# Altium PCB PCB-15_19_prototyp.PcbDoc (part 4 of 4)
Units mm, origin at the board's own origin, x right, y up, seen from the top; angles counter-clockwise.
Board outline 190 x 150 mm, 8 copper layers (Top Layer, VCC3V3, Internal Plane 1, Internal Plane 2, Mid-Layer 1, GND, Mid-Layer 2, Bottom Layer), stack 1.301 mm thick; 129 components, 396 nets, 1206 pads, 700 vias.
Unrouted connection lines stored in the file: 9.
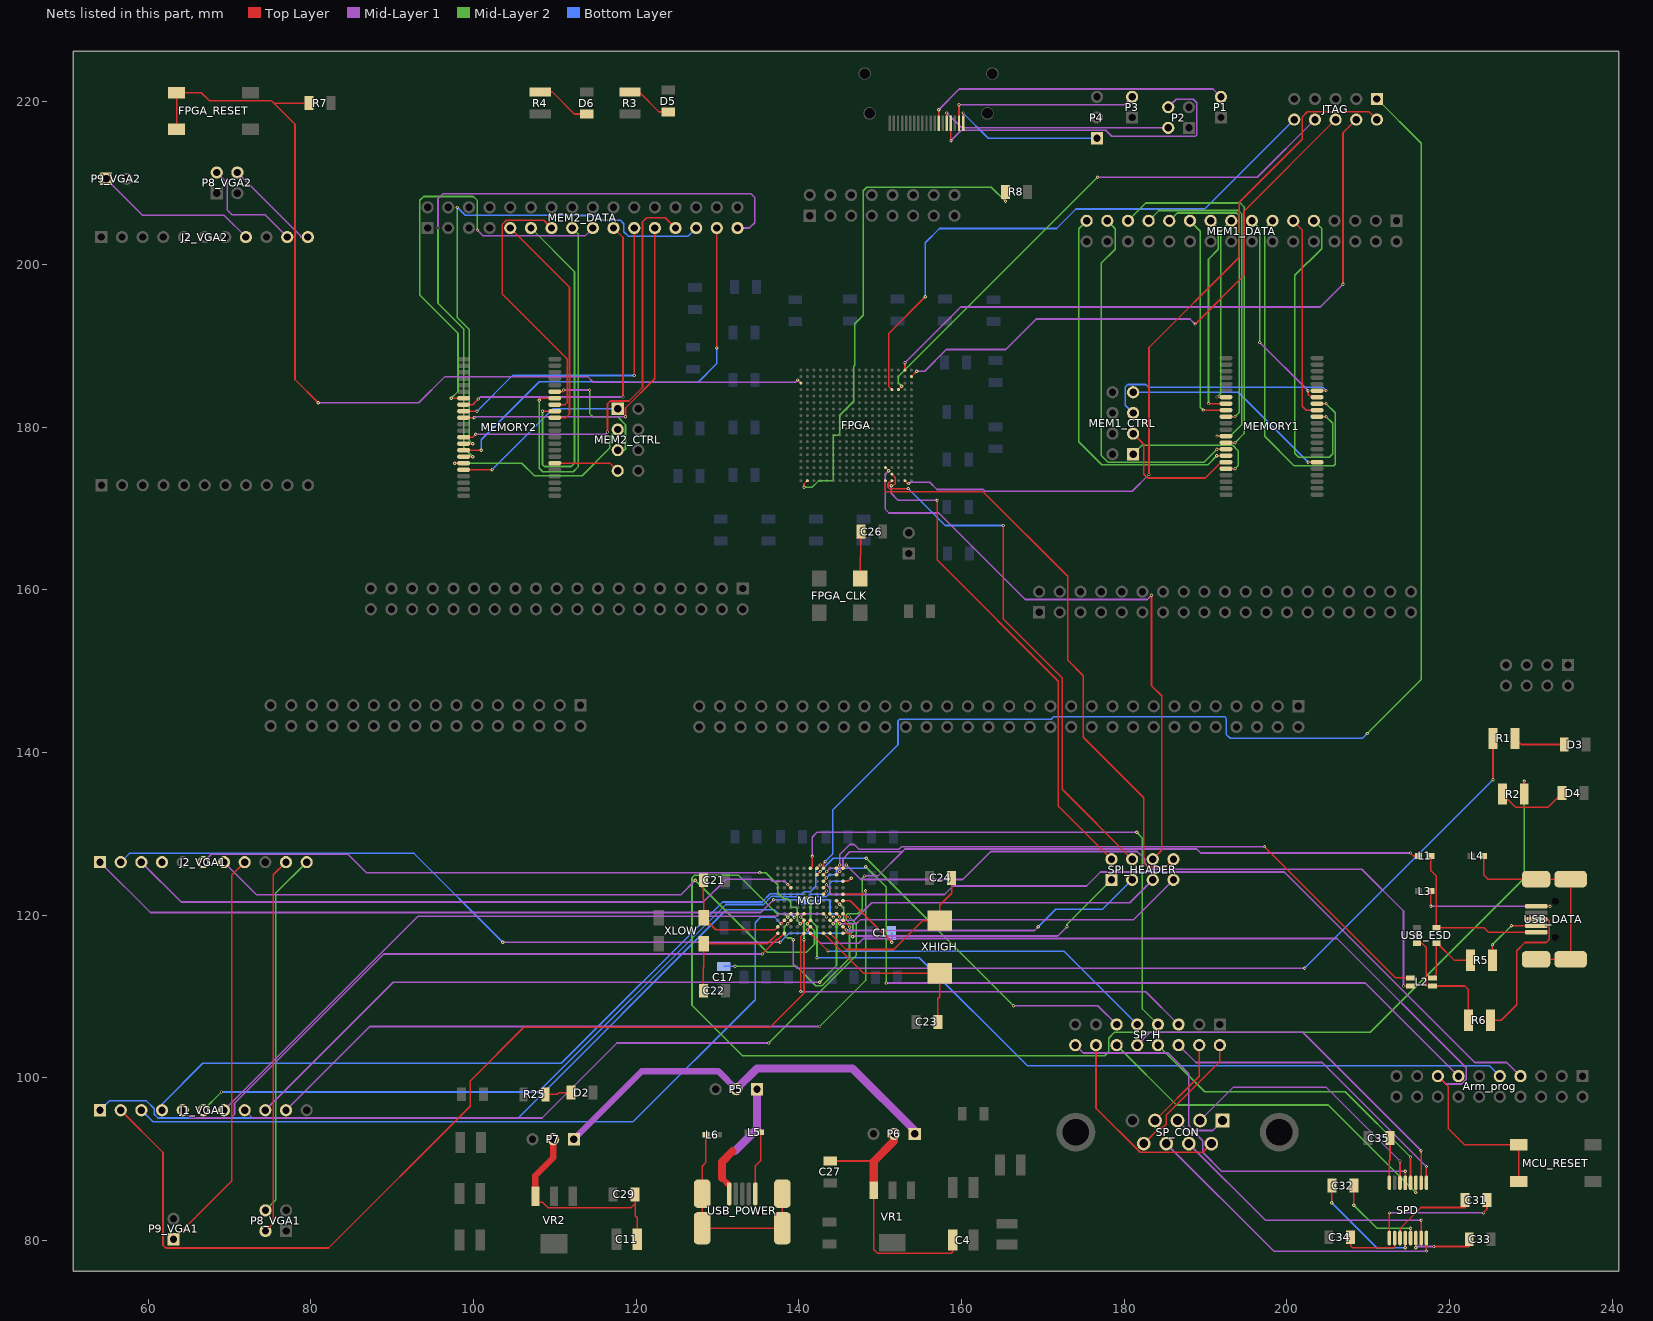
[diagram p10: the nets of this part, all layers, seen from the top]

## Via types
v1: diameter 0.4, hole 0.2, Top Layer to Bottom Layer, 696 vias
v2: diameter 7, hole 5, Top Layer to Bottom Layer, 4 vias

## Nets (pads, with @x,y where several pads share a name; then routed paths per layer and width w, separated by ;. In a path a pad name is that pad's centre, name@x,y a point inside that pad or via, vN(x,y) a via of type N, cw(c..) or ccw(c..) an arc to the next point about the centre after c; other vN are vias at no path point) (continued)
I_MEMORY.BUS4_Data_mem1: MEM1_DATA.9 MEMORY1.13 | length 41.4
  Top Layer w0.2: MEMORY1.13@203.72,181.286 v1(204.826,181.286)
  Mid-Layer 2 w0.2: MEM1_DATA.9@203.327,205.359 204.277,204.409 204.277,201.94 200.99,198.653 200.99,176.784 201.473,176.301 205.232,176.301 205.638,176.708 205.638,180.473 v1(204.826,181.286)
I_MEMORY.BUS4_Data_mem2: MEM2_DATA.9 MEMORY2.13 | length 27.9
  Top Layer w0.2: MEM2_DATA.9@104.521,204.47 111.811,197.18 111.811,181.616 111.354,181.159 MEMORY2.13@109.994,181.159
I_MEMORY.BUS5_Data_mem1: MEM1_DATA.11 MEMORY1.14 | length 25.3
  Top Layer w0.2: MEM1_DATA.11@200.787,205.359 201.905,204.241 201.905,182.569 202.387,182.086 MEMORY1.14@203.72,182.086
I_MEMORY.BUS5_Data_mem2: MEM2_DATA.11 MEMORY2.14 | length 43.4
  Top Layer w0.2: v1(108.483,181.959) MEMORY2.14@109.994,181.959
  Mid-Layer 2 w0.2: MEM2_DATA.11@107.061,204.47 112.42,199.111 112.42,175.565 112.014,175.158 108.687,175.158 108.483,175.362 v1(108.483,181.959)
I_MEMORY.BUS6_Data_mem1: MEM1_DATA.13 MEMORY1.15 | length 46.1
  Top Layer w0.2: MEMORY1.15@203.72,182.886 v1(204.826,182.886)
  Mid-Layer 2 w0.2: MEM1_DATA.13@198.247,205.359 197.282,204.394 197.282,178.867 200.889,175.26 205.765,175.26 205.943,175.438 205.943,181.768 v1(204.826,182.886)
I_MEMORY.BUS6_Data_mem2: MEM2_DATA.13 MEMORY2.15 | length 33.5
  Top Layer w0.2: MEM2_DATA.13@109.601,204.47 108.651,205.42 104.038,205.42 103.556,204.937 103.556,196.342 111.506,188.392 111.506,183.013 111.252,182.759 MEMORY2.15@109.994,182.759
I_MEMORY.BUS7_Data_mem1: MEM1_DATA.15 MEMORY1.16 | length 25.4
  Top Layer w0.2: v1(202.616,184.455) 202.616,183.896 MEMORY1.16@203.72,183.686
  Mid-Layer 1 w0.2: v1(196.672,190.398) v1(202.616,184.455)
  Mid-Layer 2 w0.2: MEM1_DATA.15@195.707,205.359 196.672,204.394 v1(196.672,190.398)
I_MEMORY.BUS7_Data_mem2: MEM2_DATA.15 MEMORY2.16 | length 45.3
  Top Layer w0.2: v1(108.077,183.286) 108.35,183.559 MEMORY2.16@109.994,183.559
  Mid-Layer 2 w0.2: v1(108.077,183.286) 108.077,174.955 108.509,174.523 112.268,174.523 112.903,175.158 112.903,203.708 MEM2_DATA.15@112.141,204.47
I_MEMORY.BUS8_Data_mem1: MEM1_DATA.17 MEMORY1.29 | length 23.5
  Top Layer w0.2: v1(191.414,183.693) 191.421,183.686 MEMORY1.29@192.52,183.686
  Mid-Layer 2 w0.2: v1(191.414,183.693) 191.877,184.155 191.877,204.069 MEM1_DATA.17@193.167,205.359
I_MEMORY.BUS8_Data_mem2: MEM2_DATA.17 MEMORY2.29 | length 54.1
  Top Layer w0.2: v1(97.282,183.559) MEMORY2.29@98.794,183.559
  Mid-Layer 1 w0.2: v1(100.482,204.216) 101.194,203.505 113.716,203.505 MEM2_DATA.17@114.681,204.47
  Mid-Layer 2 w0.2: v1(97.282,183.559) 98.095,184.372 98.095,191.541 93.396,196.24 93.396,207.874 93.878,208.356 99.974,208.356 100.482,207.848 v1(100.482,204.216)
I_MEMORY.BUS9_Data_mem1: MEM1_DATA.19 MEMORY1.30 | length 25.5
  Top Layer w0.2: v1(190.373,182.886) MEMORY1.30@192.52,182.886
  Mid-Layer 2 w0.2: v1(190.373,182.886) 190.373,200.65 191.577,201.854 191.577,204.409 MEM1_DATA.19@190.627,205.359
I_MEMORY.BUS9_Data_mem2: MEM2_DATA.19 MEMORY2.30 | length 41.2
  Top Layer w0.2: MEMORY2.30@98.794,182.759 99.892,182.759 v1(100.586,183.453) ; MEM2_DATA.19@117.221,204.47 118.389,203.302 v1(118.389,183.693)
  Mid-Layer 1 w0.2: v1(100.586,183.453) 100.826,183.693 v1(118.389,183.693)
I_MEMORY.BUS10_Data_mem1: MEM1_DATA.21 MEMORY1.31 | length 26.8
  Top Layer w0.2: v1(189.713,182.086) MEMORY1.31@192.52,182.086
  Mid-Layer 2 w0.2: MEM1_DATA.21@188.087,205.359 189.357,204.089 189.357,182.442 v1(189.713,182.086)
I_MEMORY.BUS10_Data_mem2: MEM2_DATA.21 MEMORY2.31 | length 40.9
  Top Layer w0.2: MEMORY2.31@98.794,181.959 v1(100.432,181.959) ; v1(119.761,186.334) MEM2_DATA.21@119.761,204.47
  Bottom Layer w0.2: v1(100.432,181.959) 104.807,186.334 v1(119.761,186.334)
I_MEMORY.BUS11_Data_mem1: MEM1_DATA.23 MEMORY1.32 | length 35.2
  Top Layer w0.2: MEMORY1.32@192.52,181.286 v1(193.624,181.286)
  Mid-Layer 2 w0.2: MEM1_DATA.23@185.547,205.359 186.512,206.324 193.853,206.324 194.132,206.045 194.132,181.794 v1(193.624,181.286)
I_MEMORY.BUS11_Data_mem2: MEM2_DATA.23 MEMORY2.32 | length 44.6
  Top Layer w0.2: MEMORY2.32@98.794,181.159 v1(100.076,181.159) ; v1(118.694,181.28) 118.694,182.347 122.301,185.953 MEM2_DATA.23@122.301,204.47
  Mid-Layer 1 w0.2: v1(100.076,181.159) 100.197,181.28 v1(118.694,181.28)
I_MEMORY.BUS12_Data_mem1: MEM1_DATA.25 MEMORY1.35 | length 42.8
  Top Layer w0.2: v1(191.414,178.892) 191.421,178.886 MEMORY1.35@192.52,178.886
  Mid-Layer 2 w0.2: MEM1_DATA.25@183.007,205.359 184.277,206.629 194.056,206.629 194.437,206.248 194.437,180.289 193.04,178.892 v1(191.414,178.892)
I_MEMORY.BUS12_Data_mem2: MEM2_DATA.25 MEMORY2.35 | length 51.7
  Top Layer w0.2: MEMORY2.35@98.794,178.759 99.898,178.759 v1(100.26,179.121) ; v1(116.484,179.4) 116.484,182.88 116.815,183.21 119.126,183.21 120.777,184.861 120.777,205.232 121.285,205.74 123.571,205.74 MEM2_DATA.25@124.841,204.47
  Mid-Layer 1 w0.2: v1(100.26,179.121) 116.205,179.121 v1(116.484,179.4)
I_MEMORY.BUS13_Data_mem1: MEM1_DATA.27 MEMORY1.36 | length 45.9
  Top Layer w0.2: MEMORY1.36@192.52,178.086 v1(193.624,178.086)
  Mid-Layer 2 w0.2: MEM1_DATA.27@180.467,205.359 182.651,207.543 194.259,207.543 194.742,207.061 194.742,179.204 v1(193.624,178.086)
I_MEMORY.BUS13_Data_mem2: MEM2_DATA.27 MEMORY2.36 | length 62.8
  Top Layer w0.2: MEMORY2.36@98.794,177.959 99.892,177.959 v1(99.898,177.952)
  Mid-Layer 2 w0.2: v1(98.019,207.01) 98.019,193.472 99.492,191.999 99.492,178.359 v1(99.898,177.952)
  Bottom Layer w0.2: v1(98.019,207.01) 98.984,206.045 112.624,206.045 112.649,206.019 115.25,206.019 115.849,205.42 118.074,205.42 118.491,205.003 118.491,204.013 119.05,203.454 126.365,203.454 MEM2_DATA.27@127.381,204.47
I_MEMORY.BUS14_Data_mem1: MEM1_DATA.29 MEMORY1.37 | length 46.3
  Top Layer w0.2: v1(191.408,177.286) MEMORY1.37@192.52,177.286
  Mid-Layer 2 w0.2: MEM1_DATA.29@177.927,205.359 178.892,204.394 178.892,201.879 177.19,200.177 177.19,176.505 178.003,175.692 189.814,175.692 v1(191.408,177.286)
I_MEMORY.BUS14_Data_mem2: MEM2_DATA.29 MEMORY2.37 | length 53
  Top Layer w0.2: MEMORY2.37@98.794,177.159 v1(100.965,177.159) ; v1(129.921,189.738) MEM2_DATA.29@129.921,204.47
  Bottom Layer w0.2: v1(100.965,177.159) 100.965,178.435 108.102,185.572 118.996,185.572 119.061,185.507 127.621,185.507 129.921,187.808 v1(129.921,189.738)
I_MEMORY.BUS15_Data_mem1: MEM1_DATA.31 MEMORY1.38 | length 47.3
  Top Layer w0.2: v1(191.396,176.486) MEMORY1.38@192.52,176.486
  Mid-Layer 2 w0.2: MEM1_DATA.31@175.387,205.359 174.422,204.394 174.422,178.206 177.241,175.387 190.297,175.387 v1(191.396,176.486)
I_MEMORY.BUS15_Data_mem2: MEM2_DATA.31 MEMORY2.38 | length 79.5
  Top Layer w0.2: MEMORY2.38@98.794,176.359 99.891,176.359 v1(99.898,176.352)
  Mid-Layer 1 w0.2: v1(95.631,204.47) 95.631,208.077 96.241,208.686 134.112,208.686 134.569,208.229 134.569,205.13 133.909,204.47 MEM2_DATA.31@132.461,204.47
  Mid-Layer 2 w0.2: v1(95.631,204.47) 95.631,195.224 98.806,192.049 98.806,177.444 v1(99.898,176.352)
I_MEMORY.ENABLE_Data_mem1: MEM1_CTRL.7 MEMORY1.6 | length 26.2
  Top Layer w0.2: v1(202.616,175.692) 202.622,175.686 MEMORY1.6@203.72,175.686
  Bottom Layer w0.2: MEM1_CTRL.7@181.102,184.277 194.031,184.277 v1(202.616,175.692)
I_MEMORY.ENABLE_Data_mem2: MEM2_CTRL.7 MEMORY2.6 | length 8.1
  Top Layer w0.2: MEMORY2.6@109.994,175.559 116.795,175.559 MEM2_CTRL.7@117.729,174.625
I_MEMORY.LB_Data_mem1: MEM1_CTRL.3 MEMORY1.39 | length 16.6
  Top Layer w0.2: MEM1_CTRL.3@181.102,179.197 182.397,177.902 182.397,174.219 182.88,173.736 189.967,173.736 191.917,175.686 MEMORY1.39@192.52,175.686
I_MEMORY.LB_Data_mem2: MEM2_CTRL.3 MEMORY2.39 | length 24.9
  Top Layer w0.2: v1(97.688,175.565) 97.694,175.559 MEMORY2.39@98.794,175.559
  Mid-Layer 2 w0.2: v1(97.688,175.565) 105.943,175.565 107.493,174.015 113.36,174.015 116.764,177.419 116.764,178.74 MEM2_CTRL.3@117.729,179.705
I_MEMORY.UB_Data_mem1: MEM1_CTRL.1 MEMORY1.40 | length 17.1
  Top Layer w0.2: MEMORY1.40@192.52,174.886 193.617,174.886 v1(193.624,174.879)
  Mid-Layer 2 w0.2: MEM1_CTRL.1@181.102,176.657 182.194,177.749 193.345,177.749 194.031,177.063 194.031,175.285 v1(193.624,174.879)
I_MEMORY.UB_Data_mem2: MEM2_CTRL.1 MEMORY2.40 | length 22
  Top Layer w0.2: MEMORY2.40@98.794,174.759 v1(102.286,174.759)
  Bottom Layer w0.2: v1(102.286,174.759) 109.772,182.245 MEM2_CTRL.1@117.729,182.245
I_MEMORY.WRITE_Data_mem1: MEM1_CTRL.5 MEMORY1.17 | length 29.8
  Top Layer w0.2: MEMORY1.17@203.72,184.486 v1(204.826,184.486)
  Bottom Layer w0.2: MEM1_CTRL.5@181.102,181.737 180.137,182.702 180.137,184.937 180.442,185.242 182.651,185.242 182.982,184.912 204.4,184.912 v1(204.826,184.486)
I_MEMORY.WRITE_Data_mem2: MEM2_CTRL.5 MEMORY2.17 | length 16.3
  Top Layer w0.2: MEMORY2.17@109.994,184.359 110.902,184.359 v1(111.1,184.556)
  Mid-Layer 1 w0.2: v1(111.1,184.556) v1(114.275,184.556)
  Mid-Layer 2 w0.2: v1(114.275,184.556) 114.275,181.661 114.681,181.254 117.729,181.254 118.694,180.289 118.694,177.292 118.567,177.165 MEM2_CTRL.5@117.729,177.165
I_SPI.CLK: MCU.J9 SPI_HEADER.5 | length 42.1
  Top Layer w0.2: MCU.J9@143.829,119.354 144.221,118.962 v1(144.221,118.948)
  Mid-Layer 1 w0.2: v1(144.221,118.948) 144.634,119.361 146.831,119.361 148.984,121.514 180.696,121.514 SPI_HEADER.5@183.515,124.333
I_SPI.CS: MCU.J10 SPI_HEADER.7 | length 43.8
  Top Layer w0.2: MCU.J10@144.629,119.354 v1(145.035,118.948)
  Mid-Layer 1 w0.2: v1(145.035,118.948) 147.074,118.948 147.576,119.45 181.172,119.45 SPI_HEADER.7@186.055,124.333
I_SPI.RX: MCU.K11 SPI_HEADER.3 | length 38.3
  Top Layer w0.2: MCU.K11@145.429,118.554 v1(145.821,118.161)
  Mid-Layer 1 w0.2: v1(145.821,118.161) 145.872,118.11 168.986,118.11 v1(169.443,118.567)
  Bottom Layer w0.2: v1(169.443,118.567) 171.577,120.701 177.343,120.701 SPI_HEADER.3@180.975,124.333
I_SPI.TX: MCU.L11 SPI_HEADER.1 | length 36.2
  Top Layer w0.2: MCU.L11@145.429,117.754 146.228,117.754 v1(146.634,117.348)
  Mid-Layer 1 w0.2: v1(146.634,117.348) 146.71,117.424 171.831,117.424 v1(172.974,118.567)
  Mid-Layer 2 w0.2: v1(172.974,118.567) 172.974,118.872 SPI_HEADER.1@178.435,124.333
MCU_LEDS.LED_1: MCU.J3 R1.1 | length 107.4
  Top Layer w0.2: v1(138.608,118.948) 138.623,118.948 MCU.J3@139.029,119.354 ; v1(225.345,136.627) R1.1@225.345,141.732
  Mid-Layer 1 w0.2: v1(139.319,116.967) 139.319,113.944 139.802,113.462 v1(202.18,113.462)
  Mid-Layer 2 w0.2: v1(138.608,118.948) 138.227,118.567 138.227,117.519 138.557,117.189 139.097,117.189 v1(139.319,116.967)
  Bottom Layer w0.2: v1(202.18,113.462) v1(225.345,136.627)
MCU_LEDS.LED_2: MCU.H3 R2.1 | length 158.7
  Top Layer w0.2: v1(138.633,119.736) 138.633,119.758 MCU.H3@139.029,120.154 ; R2.1@229.188,134.874 v1(229.188,136.474)
  Mid-Layer 2 w0.2: v1(138.633,119.736) 138.201,120.167 137.312,120.167 132.563,124.917 127.203,124.917 126.873,124.587 126.873,108.915 133.071,102.718 177.597,102.718 178.105,103.226 178.105,104.877 178.816,105.588 210.261,105.588 229.188,124.515 v1(229.188,136.474)
MCU_VGA-I/O.J1_P2: J1_VGA1.9 MCU.F10 | length 86.6
  Top Layer w0.2: MCU.F10@144.629,121.754 v1(145.034,121.349)
  Mid-Layer 1 w0.2: J1_VGA1.9@74.41,96.012 90.133,111.735 v1(142.57,111.735)
  Mid-Layer 2 w0.2: v1(142.57,111.735) 144.629,113.793 144.629,119.204 144.78,119.355 145.288,119.355 145.515,119.581 145.515,120.868 v1(145.034,121.349)
MCU_VGA-I/O.J1_P3: J1_VGA1.10 MCU.E11 | length 91.9
  Top Layer w0.2: MCU.E11@145.429,122.554 147.751,122.554 v1(148.209,123.012)
  Mid-Layer 1 w0.2: J1_VGA1.10@76.95,96.012 87.237,106.299 v1(142.545,106.299)
  Mid-Layer 2 w0.2: v1(142.545,106.299) 148.209,111.963 v1(148.209,123.012)
MCU_VGA-I/O.J1_P8: J1_VGA1.8 MCU.H11 | length 89.9
  Top Layer w0.2: MCU.H11@145.429,120.154 145.822,119.761 v1(146.228,119.761)
  Mid-Layer 1 w0.2: J1_VGA1.8@71.87,96.012 72.835,95.047 108.433,95.047 117.653,104.267 v1(136.296,104.267)
  Mid-Layer 2 w0.2: v1(136.296,104.267) 147.042,115.012 147.042,118.947 v1(146.228,119.761)
MCU_VGA-I/O.J1_P9: J1_VGA1.7 MCU.H8 | length 84.8
  Top Layer w0.2: MCU.H8@143.029,120.154 v1(143.408,119.775)
  Mid-Layer 1 w0.2: J1_VGA1.7@69.33,96.012 93.155,119.837 137.312,119.837 137.629,120.154 139.833,120.154 139.84,120.161 143.022,120.161 v1(143.408,119.775)
MCU_VGA-I/O.J1_P10: J1_VGA1.6 MCU.C11 | length 93.8
  Top Layer w0.2: MCU.C11@145.429,124.154 146.049,124.154 v1(146.431,124.536)
  Mid-Layer 2 w0.2: J1_VGA1.6@66.79,96.012 v1(69.025,98.247)
  Bottom Layer w0.2: v1(69.025,98.247) 107.975,98.247 131.039,121.31 135.661,121.31 136.652,122.301 137.185,122.301 137.236,122.25 140.108,122.25 140.64,121.719 141.707,121.719 142.238,122.25 143.332,122.25 143.815,122.733 143.815,123.9 144.069,124.154 146.049,124.154 v1(146.431,124.536)
MCU_VGA-I/O.J1_P11: J1_VGA1.5 MCU.L2 | length 84.6
  Top Layer w0.2: v1(135.495,115.214) 137.293,117.013 137.488,117.013 MCU.L2@138.229,117.754
  Mid-Layer 1 w0.2: J1_VGA1.5@64.25,96.012 65.215,95.047 70.155,95.047 70.612,95.504 70.612,96.87 88.957,115.214 v1(135.495,115.214)
MCU_VGA-I/O.J1_P12: J1_VGA1.4 MCU.A7 | length 95.7
  Top Layer w0.2: MCU.A7@142.229,125.754 142.229,125.783 142.608,126.162 v1(142.621,126.162)
  Bottom Layer w0.2: J1_VGA1.4@61.71,96.012 61.71,96.762 66.726,101.778 110.795,101.778 130.632,121.615 135.484,121.615 136.503,122.635 137.283,122.635 137.363,122.555 140.302,122.555 140.629,122.882 141.424,122.882 142.088,123.546 142.088,125.628 v1(142.621,126.162)
MCU_VGA-I/O.J1_P13: J1_VGA1.3 MCU.J2 | length 96.1
  Top Layer w0.2: v1(137.82,118.948) 137.823,118.948 MCU.J2@138.229,119.354
  Bottom Layer w0.2: J1_VGA1.3@59.17,96.012 60.567,94.615 119.659,94.615 134.645,109.601 134.645,119.075 135.331,119.761 137.008,119.761 v1(137.82,118.948)
MCU_VGA-I/O.J1_P14: J1_VGA1.2 MCU.H5 | length 122.6
  Top Layer w0.2: J1_VGA1.2@56.63,96.012 61.824,90.818 61.824,79.426 62.179,79.07 82.169,79.07 99.593,96.495 99.593,99.593 106.197,106.197 136.449,106.197 140.64,110.388 v1(140.64,116.967) ; v1(140.233,119.758) MCU.H5@140.629,120.154
  Mid-Layer 2 w0.2: v1(140.233,119.758) 140.64,119.352 v1(140.64,116.967)
MCU_VGA-I/O.J1_P15: J1_VGA1.1 MCU.H4 | length 98.6
  Top Layer w0.2: v1(139.421,119.736) 139.421,119.746 MCU.H4@139.829,120.154
  Bottom Layer w0.2: J1_VGA1.1@54.09,96.012 55.233,97.155 59.792,97.155 60.757,96.19 60.757,95.504 61.214,95.047 105.486,95.047 131.083,120.644 137.001,120.644 137.491,120.154 139.002,120.154 v1(139.421,119.736)
MCU_VGA-I/O.J2_P0: J2_VGA1.6 MCU.J5 | length 79.6
  Top Layer w0.2: v1(140.185,118.948) 140.223,118.948 MCU.J5@140.629,119.354
  Mid-Layer 1 w0.2: J2_VGA1.6@66.79,126.51 67.763,127.483 84.582,127.483 86.843,125.222 v1(135.204,125.222)
  Mid-Layer 2 w0.2: v1(135.204,125.222) 135.923,125.222 137.414,123.731 137.414,122.758 138.151,122.022 138.582,122.022 139.014,121.59 139.014,121.107 139.167,120.955 139.598,120.955 139.829,120.724 139.829,119.304 v1(140.185,118.948)
MCU_VGA-I/O.J2_P1: J2_VGA1.7 MCU.J6 | length 82.5
  Top Layer w0.2: v1(141.046,118.948) 141.249,119.151 MCU.J6@141.429,119.354
  Mid-Layer 1 w0.2: J2_VGA1.7@69.33,126.51 73.361,122.479 125.476,122.479 v1(127.279,124.282)
  Mid-Layer 2 w0.2: v1(127.279,124.282) 136.127,115.435 140.949,115.435 141.929,116.415 141.929,118.066 v1(141.046,118.948)
MCU_VGA-I/O.J2_P4: J2_VGA1.3 MCU.D3 | length 83.5
  Top Layer w0.2: v1(138.633,123.749) MCU.D3@139.029,123.354
  Mid-Layer 1 w0.2: J2_VGA1.3@59.17,126.51 64.065,121.615 128.262,121.615 131.065,124.419 136.464,124.419 136.729,124.154 138.228,124.154 v1(138.633,123.749)
MCU_VGA-I/O.J2_P5: J2_VGA1.2 MCU.J11 | length 96.9
  Top Layer w0.2: MCU.J11@145.429,119.354 v1(146.253,118.53)
  Mid-Layer 1 w0.2: v1(103.607,116.662) v1(137.693,116.662)
  Bottom Layer w0.2: J2_VGA1.2@56.63,126.51 57.704,127.584 92.685,127.584 v1(103.607,116.662) ; v1(137.693,116.662) 138.785,117.754 146.151,117.754 146.253,117.856 v1(146.253,118.53)
MCU_VGA-I/O.J2_P6: J2_VGA1.4 MCU.H9 | length 0.6
  Top Layer w0.2: MCU.H9@143.829,120.154 v1(144.229,119.754)
MCU_VGA-I/O.J2_P7: J2_VGA1.1 MCU.H10 | length 96.8
  Top Layer w0.2: MCU.H10@144.629,120.154 145.022,119.761 v1(145.034,119.761)
  Mid-Layer 1 w0.2: J2_VGA1.1@54.09,126.51 60.28,120.32 135.331,120.32 v1(136.898,121.887)
  Bottom Layer w0.2: v1(136.898,121.887) 139.861,121.887 140.329,121.419 142.11,121.419 142.578,121.887 143.662,121.887 143.829,121.72 143.829,120.292 143.967,120.154 144.641,120.154 v1(145.034,119.761)
Net_13: ?.13 P1.2 | length 37.8
  Top Layer w0.2: ?.13@157.195,217.367 v1(157.195,219.024)
  Mid-Layer 1 w0.2: v1(157.195,219.024) 159.735,221.564 190.932,221.564 P1.2@191.897,220.599
Net_15: ?.15 P2.2 | length 29.2
  Top Layer w0.2: ?.15@158.195,217.367 v1(158.195,218.618)
  Mid-Layer 1 w0.2: v1(158.195,218.618) 160.024,216.789 P2.2@185.42,216.789
Net_16: ?.16 P2.4 | length 41.3
  Top Layer w0.2: v1(158.695,215.214) ?.16@158.695,217.367
  Mid-Layer 1 w0.2: v1(158.695,215.214) 159.965,216.484 177.724,216.484 178.46,215.748 188.773,215.748 188.925,215.9 188.925,219.862 188.493,220.294 186.385,220.294 P2.4@185.42,219.329
Net_18: ?.18 P3.2 | length 23.9
  Top Layer w0.2: ?.18@159.695,217.367 v1(159.695,219.634)
  Mid-Layer 1 w0.2: v1(159.695,219.634) 180.01,219.634 P3.2@180.975,220.599
Net_19: ?.19 P4.1 | length 19
  Top Layer w0.2: ?.19@160.195,217.367 v1(160.195,218.618)
  Bottom Layer w0.2: v1(160.195,218.618) 163.294,215.519 P4.1@176.657,215.519
NetArm_prog_7: Arm_prog.7 MCU.D8 | length 98.3
  Top Layer w0.2: MCU.D8@143.029,123.354 143.408,123.733 v1(143.408,123.749)
  Mid-Layer 1 w0.2: v1(143.408,123.749) 143.815,123.342 143.815,122.733 144.018,122.53 157.912,122.53 158.953,123.571 175.362,123.571 177.089,125.298 199.695,125.298 223.114,101.879 227.051,101.879 Arm_prog.7@228.727,100.203
NetArm_prog_9: Arm_prog.9 MCU.E8 | length 101.3
  Top Layer w0.2: MCU.E8@143.029,122.554 143.029,122.758 143.205,122.758 v1(143.408,122.961)
  Mid-Layer 2 w0.2: v1(141.046,122.123) 141.226,122.123 141.429,121.92 141.429,119.38 142.229,118.58 v1(142.229,114.757)
  Bottom Layer w0.2: v1(141.046,122.123) 141.478,122.555 142.926,122.555 143.332,122.961 v1(143.408,122.961) ; v1(142.229,114.757) 154.813,114.757 168.072,101.498 224.892,101.498 Arm_prog.9@226.187,100.203
NetArm_prog_13: Arm_prog.13 MCU.C8 | length 96.7
  Top Layer w0.2: MCU.C8@143.029,124.154 143.383,124.508 v1(143.383,124.562)
  Mid-Layer 1 w0.2: v1(150.749,111.658) 209.652,111.658 Arm_prog.13@221.107,100.203
  Mid-Layer 2 w0.2: v1(148.234,125.957) 150.749,123.443 v1(150.749,111.658)
  Bottom Layer w0.2: v1(143.383,124.562) 143.775,124.954 144.412,124.954 144.629,125.171 144.629,125.579 144.804,125.754 148.031,125.754 v1(148.234,125.957)
NetArm_prog_15: Arm_prog.15 MCU.K6 MCU_RESET.1 MCU_RESET.3 | length 115.6
  Top Layer w0.2: v1(141.046,118.161) 141.046,118.171 MCU.K6@141.429,118.554 ; Arm_prog.15@218.567,100.203 219.837,98.933 219.837,93.751 221.839,91.749 MCU_RESET.3@228.517,91.749 MCU_RESET.1@228.517,87.249
  Mid-Layer 1 w0.2: v1(141.046,118.161) 142.659,116.548 147.358,116.548 147.93,117.119 206.172,117.119 222.072,101.219 222.072,99.822 221.488,99.238 219.532,99.238 Arm_prog.15@218.567,100.203
NetC1_1: C1.1 MCU.F11 | length 9.2
  Top Layer w0.2: MCU.F11@145.429,121.754 146.323,121.754 v1(151.415,116.662)
  Bottom Layer w0.2: v1(151.415,116.662) C1.1@151.415,117.817
NetC4_2: C4.2 C27.2 P6.2 VR1.3 | length 35.3
  Top Layer w0.2: C27.2@143.86,89.77 148.742,89.77 149.211,89.301 VR1.3@149.211,86.156 149.211,78.881 149.682,78.41 158.699,78.41 158.915,78.626 C4.2@158.915,80.04 ; 151.71,92.22 P6.2@151.71,93.1
  Top Layer w1: VR1.3@149.211,86.156 149.211,89.721 151.71,92.22
NetC11_2: C11.2 C29.2 P7.2 VR2.3 | length 27
  Top Layer w0.2: VR2.3@107.606,85.406 107.606,84.709 108.483,84.709 109.195,83.998 119.347,83.998 119.88,84.531 ; C29.2@119.88,85.66 119.88,84.531 ; C11.2@120.125,80.15 120.125,82.779 119.88,83.024 119.88,84.531
  Top Layer w0.8: VR2.3@107.606,85.406 107.606,87.966 109.8,90.16 P7.2@109.8,92.44
NetC17_2: C17.2 L1.1 MCU.B8 MCU.B10 | length 112.8
  Top Layer w0.2: MCU.B8@143.029,124.954 v1(143.429,125.354) ; MCU.B10@144.629,124.954 v1(145.029,125.354) ; v1(215.214,127.635) 215.578,127.271 L1.1@216.163,127.271
  Mid-Layer 1 w0.2: v1(143.429,125.354) 143.829,125.754 144.629,125.754 v1(145.029,125.354) 145.029,125.759 145.434,125.759 145.434,126.942 146.27,127.778 152.7,127.778 ; v1(148.082,124.816) 149.738,124.816 152.7,127.778 ; v1(215.214,127.635) 189.408,127.635 188.92,128.123 153.045,128.123 152.7,127.778
  Mid-Layer 2 w0.2: v1(132.156,113.706) 139.71,113.706 142.088,111.328 142.85,111.328 146.228,114.706 146.228,117.577 146.66,118.008 146.66,118.872 146.558,118.974 146.304,118.974 145.815,119.463 145.815,119.99 145.986,120.161 147.263,120.161 147.803,120.701 147.803,124.536 v1(148.082,124.816)
  Bottom Layer w0.2: C17.2@130.761,113.706 v1(132.156,113.706)
NetC21_2: C21.2 MCU.K1 XLOW.1 | length 14.5
  Top Layer w0.2: C21.2@128.268,124.294 128.268,121.981 128.304,121.945 XLOW.1@128.304,119.671 128.304,119.659 129.777,118.186 137.061,118.186 MCU.K1@137.429,118.554
NetC22_2: C22.2 MCU.L1 XLOW.4 | length 15.4
  Top Layer w0.2: C22.2@128.268,110.705 128.268,113.563 128.304,113.599 XLOW.4@128.304,116.459 ; XLOW.4@128.304,116.471 XLOW.4@128.304,116.459 ; MCU.L1@137.429,117.754 136.134,116.459 XLOW.4@128.304,116.459
NetC23_2: C23.2 MCU.L8 XHIGH.1 | length 22.4
  Top Layer w0.2: MCU.L8@143.029,117.754 147.943,112.84 XHIGH.1@157.33,112.84 157.33,109.968 157.09,109.728 C23.2@157.09,106.87
NetC24_2: C24.2 MCU.L9 XHIGH.2 | length 21.6
  Top Layer w0.2: MCU.L9@143.829,117.754 145.81,115.773 151.663,115.773 155.23,119.34 XHIGH.2@157.33,119.34 157.33,121.209 158.79,122.669 C24.2@158.79,124.57
NetC31_1: C31.1 SPD.3 | length 11.2
  Top Layer w0.2: SPD.3@213.909,80.293 213.909,81.473 216.484,84.049 221.916,84.049 C31.1@221.916,84.963
NetC31_2: C31.2 SPD.1 | length 16.4
  Top Layer w0.2: SPD.1@212.609,80.293 v1(212.609,83.388) ; v1(224.18,83.388) 224.616,83.824 C31.2@224.616,84.963
  Mid-Layer 1 w0.2: v1(212.609,83.388) v1(224.18,83.388)
NetC32_1: C32.1 SPD.5 | length 11.8
  Top Layer w0.2: v1(208.233,84.328) C32.1@208.233,86.741 ; SPD.5@215.209,80.293 215.209,81.478 v1(215.214,81.483)
  Mid-Layer 2 w0.2: v1(208.233,84.328) 211.078,81.483 v1(215.214,81.483)
NetC32_2: C32.2 SPD.4 | length 14.6
  Top Layer w0.2: v1(205.533,84.633) C32.2@205.533,86.741 ; v1(214.554,79.101) 214.559,79.106 SPD.4@214.559,80.293
  Bottom Layer w0.2: v1(205.533,84.633) 211.065,79.101 v1(214.554,79.101)
NetC33_2: C33.2 SPD.6 | length 8.7
  Top Layer w0.2: v1(215.849,79.096) 215.859,79.105 SPD.6@215.859,80.293 ; v1(218.084,79.248) 222.424,79.248 C33.2@222.424,80.137
  Mid-Layer 1 w0.2: v1(215.849,79.096) 216.002,79.248 v1(218.084,79.248)
NetC34_2: C34.2 SPD.2 | length 7.7
  Top Layer w0.2: C34.2@207.852,80.391 207.852,79.321 208.077,79.096 213.157,79.096 213.259,79.198 SPD.2@213.259,80.293
NetC35_2: C35.2 SPD.16 | length 5.5
  Top Layer w0.2: SPD.16@212.609,87.093 212.609,89.789 212.678,89.858 C35.2@212.678,92.583
NetD2_1: D2.1 R25.2 | length 3.2
  Top Layer w0.2: R25.2@108.86,97.96 110.312,97.96 110.522,98.17 D2.1@111.99,98.17
NetD3_1: D3.1 R1.2 | length 6.4
  Top Layer w0.2: R1.2@228.045,141.732 228.807,140.97 D3.1@234.108,140.97
NetD4_1: D4.1 R2.2 | length 8.8
  Top Layer w0.2: R2.2@226.488,134.874 228.114,133.248 232.101,133.248 D4.1@233.854,135.001
NetD5_1: D5.1 R3.2 | length 5.7
  Top Layer w0.2: R3.2@119.253,221.187 120.371,221.187 122.817,218.741 D5.1@123.952,218.741
NetD6_1: D6.1 R4.2 | length 6.8
  Top Layer w0.2: R4.2@108.204,221.187 109.703,221.187 112.403,218.487 D6.1@113.919,218.487
NetFPGA_A17: FPGA.A17 JTAG.4 | length 79.7
  Top Layer w0.2: FPGA.A17@153.047,187.007 v1(153.047,187.909) ; v1(206.908,197.561) 206.908,216.179 JTAG.4@208.534,217.805
  Mid-Layer 1 w0.2: v1(153.047,187.909) 159.905,194.767 204.114,194.767 v1(206.908,197.561)
NetFPGA_B18: FPGA.B18 JTAG.6 | length 70.4
  Top Layer w0.2: FPGA.B18@153.847,186.207 v1(154.508,186.868) ; v1(188.722,192.659) 194.742,198.679 194.742,206.553 JTAG.6@205.994,217.805
  Mid-Layer 1 w0.2: v1(154.508,186.868) 155.473,186.868 158.14,189.535 165.43,189.535 169.189,193.294 188.087,193.294 v1(188.722,192.659)
NetFPGA_C1: FPGA.C1 FPGA_RESET.1 FPGA_RESET.3 R7.1 | length 121.7
  Top Layer w0.2: FPGA_RESET.1@63.5,216.62 FPGA_RESET.3@63.5,221.12 66.535,221.12 67.539,220.116 75.159,220.116 75.438,219.837 ; R7.1@79.803,219.837 75.438,219.837 ; v1(80.924,182.982) 78.054,185.852 78.054,217.221 75.438,219.837 ; v1(139.852,185.801) FPGA.C1@140.247,185.407
  Mid-Layer 1 w0.2: v1(80.924,182.982) 93.269,182.982 96.495,186.207 114.021,186.207 114.721,185.507 139.559,185.507 v1(139.852,185.801)
NetFPGA_D15: FPGA.D15 JTAG.10 | length 71.7
  Top Layer w0.2: FPGA.D15@151.447,184.607 151.054,185 151.054,191.516 v1(155.55,196.012)
  Bottom Layer w0.2: v1(155.55,196.012) 155.55,202.667 157.302,204.419 171.679,204.419 174.066,206.807 189.916,206.807 JTAG.10@200.914,217.805
NetFPGA_D16: FPGA.D16 JTAG.8 | length 66.3
  Top Layer w0.2: FPGA.D16@152.247,184.607 v1(152.654,185.014)
  Mid-Layer 1 w0.2: v1(176.733,210.718) 196.367,210.718 JTAG.8@203.454,217.805
  Mid-Layer 2 w0.2: v1(152.654,185.014) 152.222,185.445 152.222,186.207 v1(176.733,210.718)
NetFPGA_V2: FPGA.V2 R8.1 | length 61.8
  Top Layer w0.2: v1(140.64,172.593) 140.64,173 FPGA.V2@141.047,173.407 ; v1(165.401,207.772) R8.1@165.401,208.915
  Mid-Layer 2 w0.2: v1(140.64,172.593) 141.63,172.593 142.418,173.38 144.069,173.38 144.253,173.564 144.253,178.175 144.221,178.206 144.221,178.841 144.374,178.994 144.818,178.994 145.047,179.222 145.047,181.445 146.761,183.159 146.761,187.513 146.864,187.616 146.864,192.711 147.904,193.751 147.904,209.067 148.336,209.499 163.674,209.499 v1(165.401,207.772)
NetFPGA_V17: FPGA.V17 JTAG.2 | length 93.1
  Top Layer w0.2: FPGA.V17@153.047,173.407 153.404,173.05 v1(153.518,173.05) ; v1(183.058,174.168) 183.058,189.789 194.132,200.863 194.132,207.645 201.879,215.392 201.879,218.135 202.514,218.77 210.109,218.77 JTAG.2@211.074,217.805
  Mid-Layer 1 w0.2: v1(153.518,173.05) 153.671,173.204 156.107,173.204 156.987,172.324 162.69,172.324 162.904,172.11 181,172.11 v1(183.058,174.168)
NetJ2_VGA1_8: J2_VGA1.8 P9_VGA1.1 | length 50
  Top Layer w0.2: P9_VGA1.1@63.119,80.137 70.282,87.3 70.282,124.922 J2_VGA1.8@71.87,126.51
NetJ2_VGA1_10: J2_VGA1.10 P8_VGA1.2 | length 46.4
  Top Layer w0.2: P8_VGA1.2@74.422,81.153 75.387,82.118 75.387,124.947 J2_VGA1.10@76.95,126.51
NetJ2_VGA1_11: J2_VGA1.11 P8_VGA1.4 | length 44.9
  Mid-Layer 2 w0.2: P8_VGA1.4@74.422,83.693 75.692,84.963 75.692,122.712 J2_VGA1.11@79.49,126.51
NetJ2_VGA2_8: J2_VGA2.8 P9_VGA2.1 | length 20.2
  Mid-Layer 1 w0.2: P9_VGA2.1@54.83,210.52 59.305,206.045 69.335,206.045 J2_VGA2.8@72.02,203.36
NetJ2_VGA2_10: J2_VGA2.10 P8_VGA2.2 | length 13.9
  Mid-Layer 1 w0.2: P8_VGA2.2@68.43,211.3 69.748,209.982 69.748,206.655 70.307,206.096 74.364,206.096 J2_VGA2.10@77.1,203.36
NetJ2_VGA2_11: J2_VGA2.11 P8_VGA2.4 | length 12
  Mid-Layer 1 w0.2: P8_VGA2.4@70.97,211.3 78.791,203.479 78.791,203.36 J2_VGA2.11@79.64,203.36
NetJTAG_1: JTAG.1 MCU.A8 | length 165.4
  Top Layer w0.2: MCU.A8@143.029,125.754 143.029,126.367 v1(143.231,126.568)
  Mid-Layer 2 w0.2: v1(209.88,142.316) 216.535,148.971 216.535,214.884 JTAG.1@211.074,220.345
  Bottom Layer w0.2: v1(143.231,126.568) 144.17,127.508 144.17,132.918 152.197,140.945 152.197,143.891 152.4,144.094 171.018,144.094 171.323,144.399 192.354,144.399 192.532,144.221 192.532,142.24 193.04,141.732 209.296,141.732 v1(209.88,142.316)
NetL1_2: L1.2 USB_DATA.1 USB_ESD.5 | length 21.6
  Top Layer w0.2: L1.2@217.713,127.271 217.713,125.451 218.392,124.772 USB_ESD.5@218.392,118.442 224.231,118.442 224.783,117.89 USB_DATA.1@230.67,117.89
NetL2_1: L2.1 MCU.A10 | length 79.6
  Top Layer w0.2: MCU.A10@144.629,125.754 v1(145.034,126.159) ; v1(197.239,128.423) 213.385,112.277 L2.1@215.207,112.277
  Mid-Layer 1 w0.2: v1(145.034,126.159) 145.034,127.456 146.253,128.675 146.814,128.675 147.41,128.078 152.31,128.078 152.655,128.423 v1(197.239,128.423)
NetL2_2: L2.2 R5.1 USB_ESD.4 | length 9.5
  Top Layer w0.2: L2.2@217.907,112.277 218.392,112.762 USB_ESD.4@218.392,116.542 218.491,116.542 220.606,114.427 222.573,114.427 R5.1@222.573,114.444
NetL2_3: L2.3 R6.1 USB_ESD.3 | length 15.2
  Top Layer w0.2: USB_ESD.3@215.992,116.542 216.611,116.542 217.119,116.034 217.119,111.379 217.221,111.277 L2.3@217.907,111.277 221.894,111.277 222.319,110.852 R6.1@222.319,107.078
NetL2_4: L2.4 MCU.A11 | length 84.7
  Top Layer w0.2: MCU.A11@145.429,125.754 v1(145.837,126.162) ; v1(214.351,111.277) L2.4@215.207,111.277
  Mid-Layer 1 w0.2: v1(145.837,126.162) 147.628,124.371 160.16,124.371 163.612,127.823 181.625,127.823 182.55,126.898 182.55,126.365 183.286,125.628 209.22,125.628 214.351,120.498 v1(214.351,111.277)
NetL3_2: L3.2 USB_DATA.5 | length 18.2
  Top Layer w0.2: v1(217.713,121.082) L3.2@217.713,122.953 ; USB_DATA.5@230.67,121.09 232.351,121.09 v1(232.359,121.082)
  Mid-Layer 1 w0.2: v1(217.713,121.082) v1(232.359,121.082)
NetL4_2: L4.2 USB_DATA.6 USB_DATA.7 USB_DATA.8 USB_DATA.9 | length 27.3
  Top Layer w0.2: L4.2@224.19,127.271 224.19,124.964 224.739,124.415 USB_DATA.8@230.645,124.415 USB_DATA.9@234.895,124.415 USB_DATA.7@234.895,114.565 USB_DATA.6@230.645,114.565
NetL5_2: L5.2 USB_POWER.5 | length 7.8
  Top Layer w0.2: USB_POWER.5@134.645,85.725 134.645,89.154 135.315,89.824 L5.2@135.315,93.29
NetL6_2: L6.2 USB_POWER.6 USB_POWER.7 USB_POWER.8 USB_POWER.9 | length 25.8
  Top Layer w0.2: L6.2@128.565,92.98 128.565,89.574 128.12,89.129 USB_POWER.6@128.12,85.75 USB_POWER.7@128.12,81.5 USB_POWER.9@137.97,81.5 USB_POWER.8@137.97,85.75
NetP5_1: P5.1 USB_POWER.1 | length 14.9
  Top Layer w0.2: USB_POWER.1@131.445,85.725 USB_POWER.1@131.445,86.785
  Top Layer w0.7: 130.56,87.67 USB_POWER.1@131.445,86.785
  Top Layer w1: 130.56,87.67 130.56,89.589 130.56,89.66 131.86,90.96
  Mid-Layer 1 w1: 132.13,91 134.85,93.72 P5.1@134.85,98.6
NetP5_2: P5.2 P6.1 P7.1 | length 50.9
  Mid-Layer 1 w0.2: P6.1@154.25,93.1 P6.1@154.25,93.5
  Mid-Layer 1 w0.8: P7.1@112.34,92.44 118.18,98.28 120.69,100.79 130.12,100.79 P5.2@132.31,98.6
  Mid-Layer 1 w1: P5.2@132.31,98.6 134.84,101.13 146.62,101.13 P6.1@154.25,93.5
NetR5_2: R5.2 USB_DATA.2 | length 8.3
  Top Layer w0.2: R5.2@225.273,114.444 v1(225.273,116.354) ; v1(227.609,118.69) USB_DATA.2@230.67,118.69
  Mid-Layer 2 w0.2: v1(225.273,116.354) v1(227.609,118.69)
NetR6_2: R6.2 USB_DATA.3 | length 19.2
  Top Layer w0.2: R6.2@225.019,107.078 226.365,107.078 228.27,108.983 228.27,115.621 229.286,116.637 231.877,116.637 232.283,117.043 232.283,119.278 232.071,119.49 USB_DATA.3@230.67,119.49
NetSP_CON_1: SP_CON.1 SP_H.16 | length 26.7
  Mid-Layer 1 w0.2: SP_H.16@173.99,104.013 174.955,103.048 185.42,103.048 187.96,100.508 187.96,94.132 188.57,93.523 190.886,93.523 SP_CON.1@192.103,94.74
NetSP_CON_2: SP_CON.2 SPD.14 | length 32.7
  Top Layer w0.2: SPD.14@213.909,87.093 v1(213.909,89.764)
  Mid-Layer 1 w0.2: SP_CON.2@189.333,94.74 193.45,98.857 204.816,98.857 v1(213.909,89.764)
NetSP_CON_3: SP_CON.3 SPD.13 | length 32.8
  Top Layer w0.2: SPD.13@214.559,87.093 v1(214.559,88.519)
  Mid-Layer 1 w0.2: SP_CON.3@186.563,94.74 188.139,93.164 188.751,93.164 189.662,92.253 189.662,90.83 191.973,88.519 v1(214.559,88.519)
NetSP_CON_4: SP_CON.4 SP_H.4 | length 11.5
  Top Layer w0.2: SP_CON.4@183.793,94.74 189.23,100.177 SP_H.4@189.23,104.013
NetSP_CON_6: SP_CON.6 SP_H.14 | length 24.6
  Top Layer w0.2: SP_H.14@176.53,104.013 176.53,96.266 181.966,90.83 189.648,90.83 SP_CON.6@190.718,91.9
NetSP_CON_7: SP_CON.7 SPD.7 | length 34.6
  Top Layer w0.2: SPD.7@216.509,80.293 v1(216.509,82.474)
  Mid-Layer 1 w0.2: SP_CON.7@187.948,91.9 197.374,82.474 v1(216.509,82.474)
NetSP_CON_8: SP_CON.8 SPD.8 | length 39.1
  Top Layer w0.2: v1(217.159,78.689) SPD.8@217.159,80.293
  Mid-Layer 1 w0.2: SP_CON.8@185.178,91.9 198.389,78.689 v1(217.159,78.689)
NetSP_CON_9: SP_CON.9 SP_H.2 | length 16.2
  Top Layer w0.2: SP_CON.9@182.408,91.9 184.386,93.878 184.76,93.878 185.166,94.285 185.166,95.428 191.77,102.032 SP_H.2@191.77,104.013
NetSP_H_6: SP_H.6 SPD.9 | length 38.6
  Top Layer w0.2: SPD.9@217.159,87.093 v1(217.159,89.078)
  Mid-Layer 1 w0.2: SP_H.6@186.69,104.013 188.824,101.879 204.357,101.879 v1(217.159,89.078)
NetSP_H_8: SP_H.8 SPD.12 | length 39.9
  Top Layer w0.2: SPD.12@215.209,87.093 v1(215.209,90.246)
  Mid-Layer 2 w0.2: SP_H.8@184.15,104.013 189.89,98.273 207.183,98.273 v1(215.209,90.246)
NetSP_H_10: SP_H.10 SPD.10 | length 45.5
  Top Layer w0.2: SPD.10@216.509,87.093 v1(216.509,91.034)
  Mid-Layer 1 w0.2: SP_H.10@181.61,104.013 183.185,105.588 201.955,105.588 v1(216.509,91.034)
NetSP_H_12: SP_H.12 SPD.11 | length 45.5
  Top Layer w0.2: v1(215.849,85.903) 215.859,85.913 SPD.11@215.859,87.093
  Mid-Layer 2 w0.2: SP_H.12@179.07,104.013 186.436,96.647 205.105,96.647 v1(215.849,85.903)
OUTPUT: C26.1 FPGA_CLK.3 | length 5.8
  Top Layer w0.2: FPGA_CLK.3@147.574,161.374 147.574,164.236 147.621,164.283 C26.1@147.621,167.148
SPI.BACKUP_CLK: FPGA.T14 SPI_HEADER.6 | length 76.4
  Top Layer w0.2: FPGA.T14@150.647,175.007 151.029,174.625 v1(151.054,174.625) ; v1(183.363,159.309) 183.363,148.209 184.607,146.964 184.607,127.965 SPI_HEADER.6@183.515,126.873
  Mid-Layer 1 w0.2: v1(151.054,174.625) 150.647,174.218 150.647,169.875 151.079,169.443 157.201,169.443 167.843,158.801 182.855,158.801 v1(183.363,159.309)
SPI.BACKUP_CS: FPGA.V14 SPI_HEADER.8 | length 71.4
  Top Layer w0.2: FPGA.V14@150.647,173.407 150.647,172.096 150.715,172.027 162.668,172.027 173.05,161.646 173.05,151.359 174.981,149.428 174.981,141.859 182.423,134.417 182.423,126.365 182.88,125.908 185.09,125.908 SPI_HEADER.8@186.055,126.873
SPI.BACKUP_RX: FPGA.V15 SPI_HEADER.4 | length 64.8
  Top Layer w0.2: FPGA.V15@151.447,173.407 151.224,173.184 151.079,173.184 150.959,173.063 150.959,172.618 151.181,172.396 153.397,172.396 v1(153.441,172.441) ; v1(165.125,167.894) 165.125,156.413 172.39,149.149 172.39,135.458 SPI_HEADER.4@180.975,126.873
  Bottom Layer w0.2: v1(153.441,172.441) 157.988,167.894 v1(165.125,167.894)
SPI.BACKUP_TX: FPGA.U15 SPI_HEADER.2 | length 61.9
  Top Layer w0.2: v1(151.359,172.796) 151.587,172.796 151.841,173.05 151.841,173.813 FPGA.U15@151.447,174.207 ; v1(156.997,171.018) 156.997,163.678 171.907,148.768 171.907,133.401 SPI_HEADER.2@178.435,126.873
  Mid-Layer 1 w0.2: v1(151.359,172.796) 151.359,171.849 152.189,171.018 v1(156.997,171.018)
UART0.CTRL_RX: MCU.L5 SP_H.5 | length 55.5
  Top Layer w0.2: v1(140.233,110.592) 140.233,117.358 MCU.L5@140.629,117.754
  Mid-Layer 1 w0.2: v1(140.233,110.592) 182.651,110.592 SP_H.5@186.69,106.553
UART0.CTRL_TX: MCU.L6 SP_H.9 | length 44.8
  Top Layer w0.2: MCU.L6@141.429,117.754 v1(143.588,115.595)
  Bottom Layer w0.2: v1(143.588,115.595) 143.622,115.561 172.602,115.561 SP_H.9@181.61,106.553
UART0.RX: MCU.A6 SP_H.7 | length 68.8
  Top Layer w0.2: MCU.A6@141.429,125.754 141.649,125.974 v1(141.649,127.254)
  Mid-Layer 1 w0.2: v1(141.649,127.254) 141.649,129.584 142.24,130.175 v1(181.534,130.175)
  Mid-Layer 2 w0.2: v1(181.534,130.175) 182.245,129.464 182.245,108.458 SP_H.7@184.15,106.553
UART0.TX: MCU.B7 SP_H.11 | length 46.1
  Top Layer w0.2: MCU.B7@142.229,124.954 142.621,125.346 v1(142.621,125.349)
  Mid-Layer 1 w0.2: v1(166.395,108.864) 176.759,108.864 SP_H.11@179.07,106.553
  Mid-Layer 2 w0.2: v1(148.285,126.975) v1(166.395,108.864)
  Bottom Layer w0.2: v1(142.621,125.349) 144.247,126.975 v1(148.285,126.975)
pads on no net: ?. Arm_prog.2 Arm_prog.3 Arm_prog.5 Arm_prog.11 Arm_prog.17 Arm_prog.19 FPGA.A10 FPGA.A11 FPGA.A12 FPGA.A13 FPGA.A14 FPGA.A15 FPGA.A16 FPGA.B11 FPGA.B12 FPGA.B14 FPGA.B16 FPGA.C2 FPGA.C4 FPGA.C5 FPGA.C12 FPGA.C13 FPGA.C14 FPGA.C15 FPGA.D1 FPGA.D2 FPGA.D3 FPGA.D4 FPGA.D12 FPGA.D14 FPGA.E1 FPGA.E3 FPGA.E4 FPGA.E6 FPGA.E7 FPGA.E8 FPGA.E11 FPGA.E12 FPGA.E13 FPGA.F1 FPGA.F3 FPGA.F4 FPGA.F5 FPGA.F6 FPGA.F7 FPGA.F8 FPGA.F9 FPGA.F10 FPGA.F11 FPGA.F12 FPGA.F13 FPGA.G6 FPGA.G8 FPGA.G9 FPGA.G11 FPGA.H5 FPGA.H6 FPGA.H7 FPGA.L14 FPGA.M13 FPGA.M14 FPGA.M18 FPGA.N11 FPGA.N12 FPGA.N14 FPGA.N15 FPGA.N16 FPGA.N17 FPGA.N18 FPGA.P15 FPGA.P16 FPGA.R13 FPGA.T6 FPGA.T17 FPGA.T18 FPGA.U17 FPGA.U18 FPGA.V3 J1_VGA1.11 J1_VGA2.11 J2_VGA1.5 J2_VGA2.5 MCU.E5 MCU.E6 MCU.E7 MCU.F5 MCU.F6 MCU.F7 MCU.G5 MCU.G6 MCU.G7 P1.1 P2.1 P2.3 P3.1 P4.2 P4.3 P8_VGA1.1 P8_VGA1.3 P8_VGA2.1 P8_VGA2.3 P9_VGA1.2 P9_VGA2.2 USB_DATA.4 USB_DATA.X USB_DATA.Y USB_ESD.1 USB_POWER.2 USB_POWER.3 USB_POWER.4 USB_POWER.X USB_POWER.Y VR1.4 VR2.4 XLOW.2 XLOW.3
copper on no net: | length 0
  Top Layer w0.2: 131.86,90.96 131.86,91
  other v2: 235.703,81.779 56.379,82.033 235.449,220.971 56.125,221.098

## Polygon pours and split planes (outlines as drawn)
3.3V on VCC3V3 (split plane): 240.29,76.71 51.31,76.71 51.31,225.69 240.29,225.69
no net on Internal Plane 1 (split plane): 240.29,76.71 51.31,76.71 51.31,225.69 240.29,225.69
no net on Internal Plane 2 (split plane): 240.29,76.71 51.31,76.71 51.31,225.69 240.29,225.69
GND on GND (split plane): 240.29,76.71 51.31,76.71 51.31,225.69 240.29,225.69

## Keep-outs
Keep-Out Layer:
  lines w0.3: 52.1,77.5 239.5,77.5 239.5,224.9 52.1,224.9 52.1,77.5

## Text inside footprints (layer, text, board x,y; h text height)
Arm_prog: Top Overlay "2" at 238.887,98.171 h1.27 r180; Top Overlay "1" at 238.887,100.711 h1.27 r180; Top Overlay "19" at 211.963,100.711 h1.27 r180; Top Overlay "20" at 211.963,98.171 h1.27 r180
EBI_address: Top Overlay "60" at 123.6,142.43 h1.27; Top Overlay "59" at 123.53,144.89 h1.27; Top Overlay "1" at 203.26,145.04 h1.27; Top Overlay "2" at 203.18,142.43 h1.27
EBI_DATA: Top Overlay "32" at 70.96,142.65 h1.27; Top Overlay "31" at 71.32,145.11 h1.27; Top Overlay "1" at 115.28,145.04 h1.27; Top Overlay "2" at 115.21,142.58 h1.27
GPIO: Top Overlay "8" at 225.425,148.717 h1.27 r180; Top Overlay "7" at 225.425,151.257 h1.27 r180; Top Overlay "1" at 236.601,151.257 h1.27 r180; Top Overlay "2" at 237.109,148.717 h1.27 r180
HDMI_header: Top Overlay "16" at 160.655,208.026 h1.27; Top Overlay "15" at 160.655,205.486 h1.27; Top Overlay "1" at 138.811,205.486 h1.27; Top Overlay "2" at 138.811,208.026 h1.27
JTAG: Top Overlay "2" at 213.614,218.313 h1.27 r180; Top Overlay "1" at 213.106,220.853 h1.27 r180; Top Overlay "9" at 199.39,220.853 h1.27 r180; Top Overlay "10" at 199.39,218.313 h1.27 r180
MEM1_ADDR: Top Overlay "38" at 216.789,159.258 h1.27; Top Overlay "37" at 216.789,156.718 h1.27; Top Overlay "1" at 167.005,156.718 h1.27; Top Overlay "2" at 167.005,159.258 h1.27
MEM1_CTRL: Top Overlay "8" at 179.07,185.801 h1.27 r90; Top Overlay "7" at 181.61,185.801 h1.27 r90; Top Overlay "1" at 181.61,174.625 h1.27 r90; Top Overlay "2" at 179.07,174.117 h1.27 r90
MEM1_DATA: Top Overlay "32" at 171.33,202.08 h1.27; Top Overlay "31" at 172.29,204.62 h1.27; Top Overlay "1" at 215.78,204.78 h1.27; Top Overlay "2" at 215.62,202.31 h1.27
MEM2_ADDR: Top Overlay "38" at 83.34,156.84 h1.27; Top Overlay "37" at 83.49,159.38 h1.27; Top Overlay "1" at 135.05,159.52 h1.27; Top Overlay "2" at 135.05,156.84 h1.27
MEM2_CTRL: Top Overlay "8" at 119.761,173.101 h1.27 r270; Top Overlay "7" at 117.221,173.101 h1.27 r270; Top Overlay "1" at 117.221,184.277 h1.27 r270; Top Overlay "2" at 119.761,184.785 h1.27 r270
MEM2_DATA: Top Overlay "32" at 133.985,206.502 h1.27; Top Overlay "31" at 133.985,203.962 h1.27; Top Overlay "1" at 91.821,203.962 h1.27; Top Overlay "2" at 91.821,206.502 h1.27
P2: Top Overlay "3" at 188.468,220.853 h1.27 r90; Top Overlay "4" at 185.928,220.853 h1.27 r90; Top Overlay "2" at 185.928,214.249 h1.27 r90; Top Overlay "1" at 188.468,214.757 h1.27 r90
P8_VGA1: Top Overlay "3" at 77.47,85.217 h1.27 r90; Top Overlay "4" at 74.93,85.217 h1.27 r90; Top Overlay "2" at 74.93,78.613 h1.27 r90; Top Overlay "1" at 77.47,79.121 h1.27 r90
P8_VGA2: Top Overlay "3" at 72.494,208.252 h1.27; Top Overlay "4" at 72.494,210.792 h1.27; Top Overlay "2" at 65.89,210.792 h1.27; Top Overlay "1" at 66.398,208.252 h1.27
SP_CON: Top Overlay "1" at 192.353,98.195 h1.5 r180; Top Overlay "5" at 181.523,98.195 h1.5 r180; Top Overlay "9" at 182.908,88.795 h1.5 r180; Top Overlay "6" at 191.218,88.795 h1.5 r180
SP_H: Top Overlay "16" at 170.18,103.251 h1.27; Top Overlay "15" at 170.18,106.045 h1.27; Top Overlay "1" at 193.675,106.172 h1.27; Top Overlay "2" at 193.675,103.251 h1.27
SPI_HEADER: Top Overlay "8" at 187.579,126.365 h1.27; Top Overlay "7" at 187.579,123.825 h1.27; Top Overlay "1" at 176.403,123.825 h1.27; Top Overlay "2" at 175.895,126.365 h1.27
?: Top Overlay "HDMI" at 158.805,214.797 h1.52 r180